# Altium PCB LM399_Test_Base.PcbDoc
Units mm, origin at the board's own origin, x right, y up, seen from the top; angles counter-clockwise.
Board outline 217.3 x 50.57 mm, 4 copper layers (Top Layer, Layer 1, Layer 2, Bottom Layer), stack 1.587 mm thick; 37 components, 11 nets, 102 pads, 167 vias.
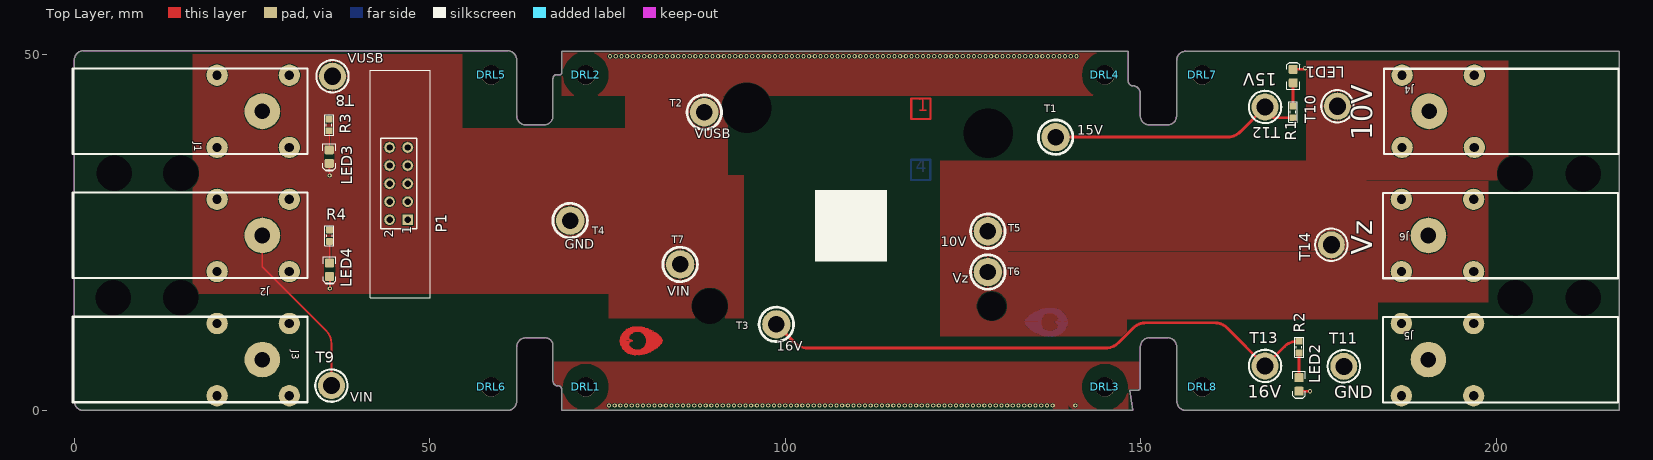
[diagram p0: Top Layer view]
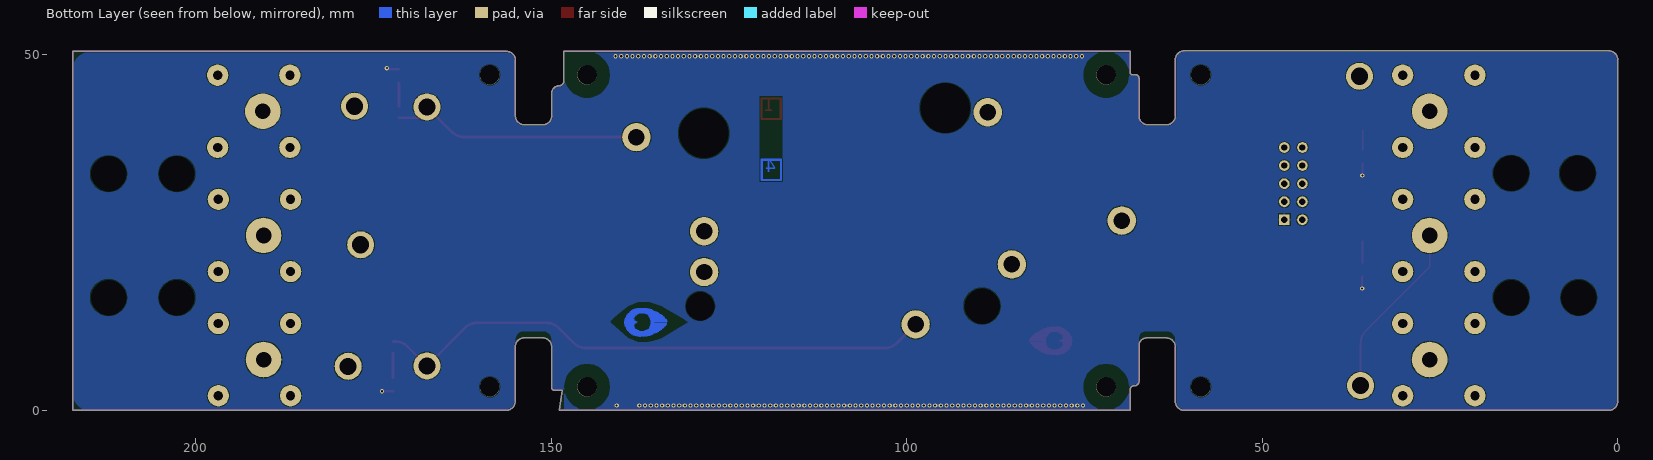
[diagram p1: Bottom Layer view, seen from below]
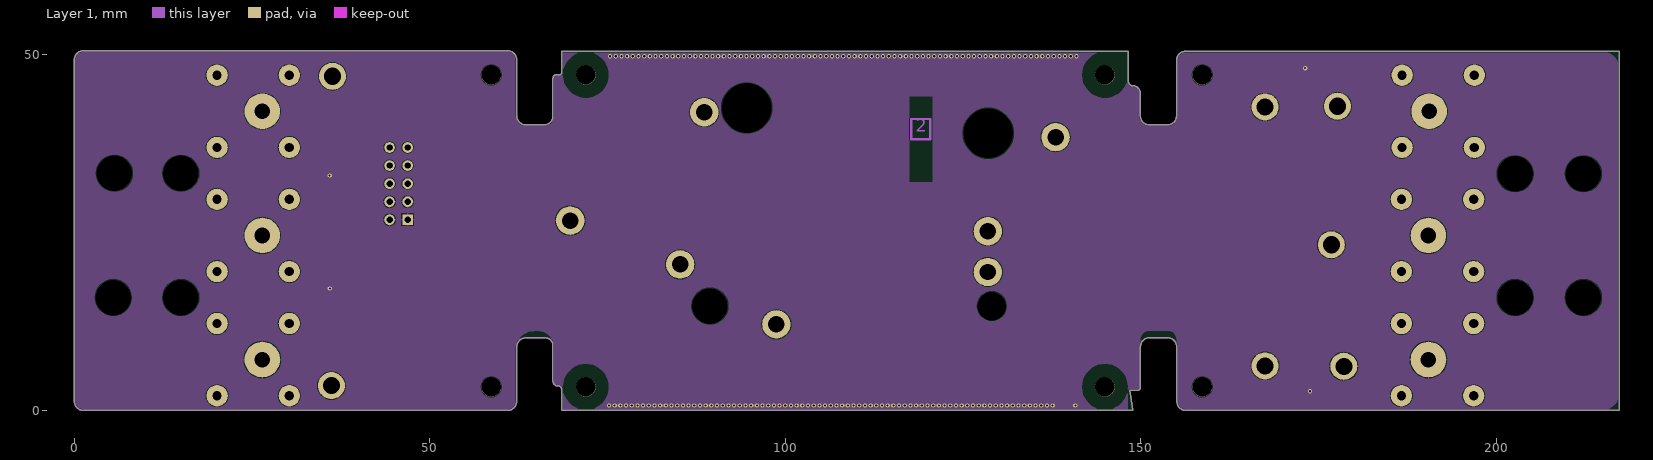
[diagram p2: Layer 1]
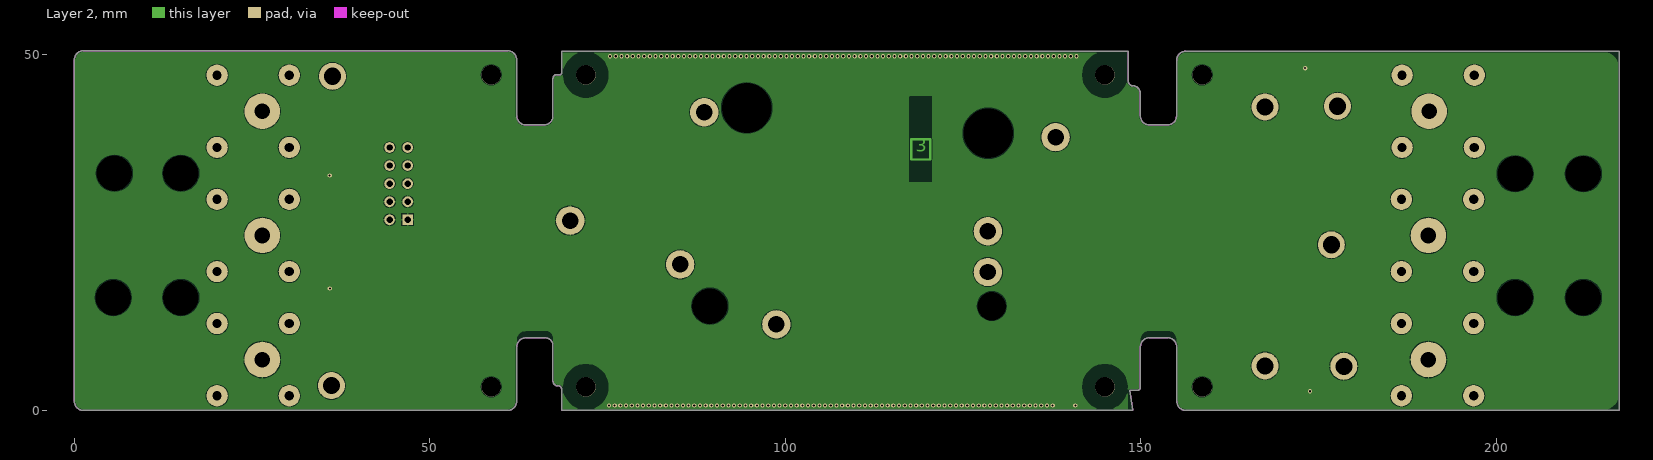
[diagram p3: Layer 2]
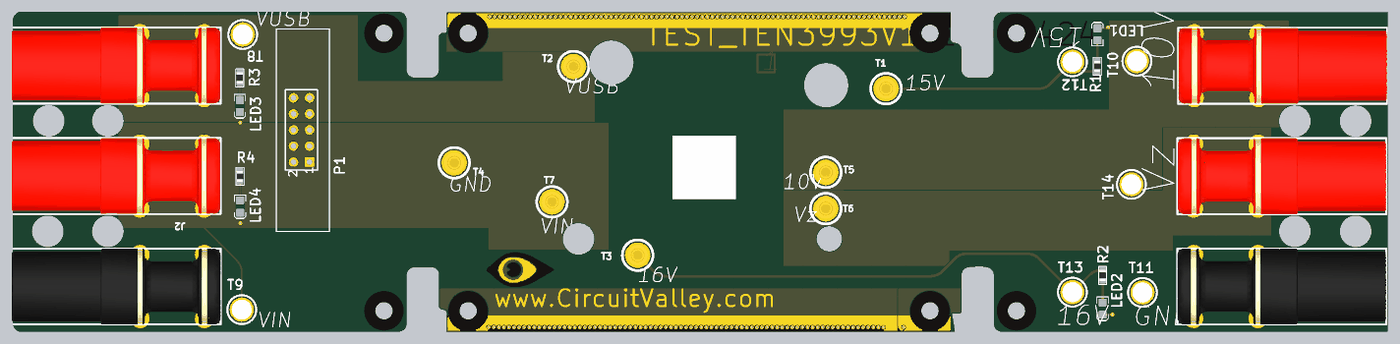
[diagram p4: 3D render of the assembled board from above, using the file's embedded part models]

## Layer stack, top to bottom
Top Solder: solder mask 0.0102, Solder Resist, Dk 3.5
Top Layer: signal copper 0.0356
Dielectric 2: prepreg 0.2104, PP-006, Dk 4.1
Layer 1: signal copper 0.0152
Dielectric 1: dielectric 1.065, FR-4, Dk 4.8
Layer 2: signal copper 0.0152
Dielectric 3: prepreg 0.2104, PP-006, Dk 4.1
Bottom Layer: signal copper 0.0356
Bottom Solder: solder mask 0.0102, Solder Resist, Dk 3.5

## Board outline
0,1.27 ccw(c1.27,1.27) 1.27,0 60.96,0 ccw(c60.96,1.27) 62.23,1.27 62.23,8.915 cw(c63.5,8.915) 63.5,10.185 66.269,10.185 cw(c66.269,9.119) 67.335,9.119 67.335,4.089 ccw(c67.97,4.089) 67.97,3.454 68.072,3.454 cw(c68.072,2.972) 68.555,2.972 68.555,0 148.913,0 148.463,2.845 149.581,2.845 ccw(c149.581,3.226) 149.962,3.226 149.962,8.941 cw(c151.232,8.941) 151.232,10.211 153.797,10.211 cw(c153.797,8.941) 155.067,8.941 155.067,1.27 ccw(c156.337,1.27) 156.337,0 217.297,0 217.297,50.5 156.718,50.5 156.312,50.5 ccw(c156.312,49.23) 155.042,49.23 155.042,41.427 cw(c153.772,41.427) 153.772,40.157 151.206,40.157 cw(c151.206,41.427) 149.936,41.427 149.936,44.577 ccw(c148.844,44.577) 148.844,45.669 cw(c148.844,46.259) 148.255,46.259 148.255,50.5 68.555,50.5 68.555,47.463 cw(c68.31,47.463) 68.31,47.219 67.843,47.219 ccw(c67.843,46.711) 67.335,46.711 67.335,41.427 cw(c66.065,41.427) 66.065,40.157 63.5,40.157 cw(c63.5,41.427) 62.23,41.427 62.23,49.301 ccw(c60.96,49.301) 60.96,50.571 1.27,50.571 ccw(c1.27,49.301) 0,49.301

## Design rules (kind name [scope] priority, off if disabled: settings)
Clearance Clearance_GNDT [OnLayer('GND_T')] p1: gap=0.127 ignorepadtopadclearanceinfootprint=FALSE
Clearance Clearance_INT [OnLayer('Signal_INT')] p2: gap=0.127 ignorepadtopadclearanceinfootprint=FALSE
Clearance [All] p3: gap=0.092 ignorepadtopadclearanceinfootprint=FALSE
Clearance Clearance_PWR [OnLayer('PWR')] p4: gap=0.127 ignorepadtopadclearanceinfootprint=FALSE
Clearance Clearance_GNDB [OnLayer('GND_B')] p5: gap=0.127 ignorepadtopadclearanceinfootprint=FALSE
ComponentClearance [All] p1: gap=0.254 collisioncheckmode=3 verticalgap=0 showdistances=FALSE
DiffPairsRouting [All] p1: maxlimit=0.102 minlimit=0.102 mostfreqgap=0.102 toplayer_minwidth=0.117 toplayer_maxwidth=0.254 toplayer_prefwidth=0.117 midlayer1_minwidth=0.117 midlayer1_maxwidth=0.254 midlayer1_prefwidth=0.117 midlayer2_minwidth=0.117 midlayer2_maxwidth=0.254 midlayer2_prefwidth=0.117 bottomlayer_minwidth=0.117 bottomlayer_maxwidth=0.254 bottomlayer_prefwidth=0.117 maxuncoupledlength=12.7
HoleSize [All] p1: absolutevalues=TRUE maxlimit=5 minlimit=0.025 maxpercent=80.000 minpercent=20.000
MatchedLengths Matched_MIPI_GRP [InNetClass('MIPI')] p1: tolerance=0.127 checknetsindiffpair=FALSE checkdiffpairvsdiffpair=TRUE checkxsignals=TRUE checkothers=TRUE
MatchedLengths Matched_MIPI [InNetClass('MIPI')] p2: tolerance=0.127 checknetsindiffpair=TRUE checkdiffpairvsdiffpair=FALSE checkxsignals=FALSE checkothers=FALSE
MatchedLengths Matched_GPIF_GRP [InNetClass('GPIF')] p3: tolerance=1.27 checknetsindiffpair=FALSE checkdiffpairvsdiffpair=TRUE checkxsignals=TRUE checkothers=TRUE
MatchedLengths Matched_USB3FX_GRP [InNetClass('USB3FX')] p4: tolerance=0.127 checknetsindiffpair=FALSE checkdiffpairvsdiffpair=TRUE checkxsignals=TRUE checkothers=TRUE
MatchedLengths Match_USB3FX [InNetClass('USB3FX')] p5: tolerance=0.102 checknetsindiffpair=TRUE checkdiffpairvsdiffpair=FALSE checkxsignals=FALSE checkothers=FALSE
MatchedLengths Matched_USB3_GRP [InNetClass('USB3')] p6: tolerance=0.254 checknetsindiffpair=FALSE checkdiffpairvsdiffpair=TRUE checkxsignals=TRUE checkothers=TRUE
MatchedLengths Matched_USB2 [InNetClass('USB2')] p7: tolerance=1.016 checknetsindiffpair=TRUE checkdiffpairvsdiffpair=FALSE checkxsignals=FALSE checkothers=FALSE
MatchedLengths Matched_USB3 [InNetClass('USB3')] p8: tolerance=0.102 checknetsindiffpair=TRUE checkdiffpairvsdiffpair=FALSE checkxsignals=FALSE checkothers=FALSE
MinimumSolderMaskSliver [All] p1: minsoldermaskwidth=0.001
PlaneClearance [All] p1: clearance=0.152
PlaneConnect PlaneConnect_1 [All] p1: pad.planeconnectstyle=Relief pad.reliefexpansion=0.508 pad.reliefentries=4 pad.reliefconductorwidth=0.254 pad.reliefairgap=0.127 via.planeconnectstyle=Direct via.reliefexpansion=0.508 via.reliefentries=4 via.reliefconductorwidth=0.254 via.reliefairgap=0.254
PolygonConnect [All] p1: thpad.connectstyle=Relief thpad.reliefconductorwidth=0.254 thpad.reliefentries=4 thpad.polygonreliefangle="90 Angle" thpad.airgapwidth=0.127 smdpad.connectstyle=Relief smdpad.reliefconductorwidth=0.254 smdpad.reliefentries=4 smdpad.polygonreliefangle="90 Angle" smdpad.airgapwidth=0.127 via.connectstyle=Direct via.reliefconductorwidth=0.254 via.reliefentries=4 via.polygonreliefangle="90 Angle" via.airgapwidth=0.254
RoutingVias [All] p1: holewidth=0.2 width=0.45 viastyle="Through Hole" minholewidth=0.2 minwidth=0.45 maxholewidth=6.3 maxwidth=7
SilkToSilkClearance [All] p1: silktosilkclearance=0
SilkToSolderMaskClearance [IsPad] p1: minsilkscreentomaskgap=0 clearancetoexposedcopper=TRUE
SolderMaskExpansion [All] p1: expansion=0.025 istentingtop=FALSE
Width [All] p1: maxlimit=1.27 minlimit=0.09 preferedwidth=0.127 midlayer1_minwidth=0.127 midlayer2_minwidth=0.127 minimp=50.000000 maximp=50.000000 favimp=50.000000
22 further rules are at their usual default settings.

## Components (designator, comment, footprint, x,y, rotation, side; value= is the part's Value field where it differs from the comment)
DRL1 "Mounting" NO_COPPER_NOMASK_2m75_6m2#1 71.958,3.302 r0 top locked
DRL2 "Mounting" NO_COPPER_NOMASK_2m75_6m2#1 71.958,47.185 r0 top locked
DRL3 "Mounting" NO_COPPER_NOMASK_2m75_6m2#2 143.972,3.302 r0 top locked
DRL4 "Mounting" NO_COPPER_NOMASK_2m75_6m2#3 144.272,46.685 r0 top locked
DRL5 "Mounting" NO_COPPER_NOMASK_2m75_6m2#4 58.649,47.185 r0 top
DRL6 "Mounting" NO_COPPER_NOMASK_2m75_6m2#4 58.649,3.302 r0 top
DRL7 "Mounting" NO_COPPER_NOMASK_2m75_6m2#4 158.648,47.185 r0 top
DRL8 "Mounting" NO_COPPER_NOMASK_2m75_6m2#5 158.648,3.581 r0 top
J1 "Banana" Banana_66.9040-22_RED 25.171,42.062 r180 top
J2 "Banana" Banana_66.9040-22_RED 25.171,24.6 r180 top
J3 "Banana" Banana_66.9040-21_BLACK 25.171,7.137 r180 top
J4 "Banana" Banana_66.9040-22_RED 191.846,42.062 r0 top
J5 "Banana" Banana_66.9040-21_BLACK 191.745,7.137 r0 top
J6 "Banana" Banana_66.9040-22_RED 191.745,24.6 r0 top
LED1 "" LED-0805-K 171.45,47.015 r90 top
LED2 "" LED-0805-K 172.263,3.645 r270 top
LED3 "" LED-0805-K 35.865,35.687 r270 top
LED4 "" LED-0805-K 35.916,19.774 r270 top
P1 "IDC" HDR2X5 46.887,26.813 r90 top
R1 "RES_NL_0603" RESC1608N 171.425,41.961 r90 top value=5K1
R2 "RES_NL_0603" RESC1608N 172.263,8.89 r270 top value=5K1
R3 "RES_NL_0603" RESC1608N 35.839,40.132 r270 top value=5K1
R4 "RES_NL_0603" RESC1608N 35.89,24.562 r270 top value=5K1
T1 "POGO" POGO_0851-0-15-20-82-14-11-0 138.024,38.43 r0 top locked
T2 "POGO" POGO_0851-0-15-20-82-14-11-0 88.612,41.929 r0 top locked
T3 "POGO" POGO_0851-0-15-20-82-14-11-0 98.755,12.09 r0 top locked
T4 "POGO" POGO_0851-0-15-20-82-14-11-0 69.748,26.695 r0 top locked
T5 "POGO" POGO_0851-0-15-20-82-14-11-0 128.499,25.197 r0 top locked
T6 "POGO" POGO_0851-0-15-20-82-14-11-0 128.499,19.456 r0 top locked
T7 "POGO" POGO_0851-0-15-20-82-14-11-0 85.217,20.523 r0 top locked
T8 "TestHook" 1502-x 36.322,46.99 r0 top
T9 "TestHook" 1502-x 36.17,3.48 r0 top
T10 "TestHook" 1502-x 177.673,42.774 r0 top
T11 "TestHook" 1502-x 178.562,6.198 r0 top
T12 "TestHook" 1502-x 167.488,42.672 r0 top
T13 "TestHook" 1502-x 167.488,6.248 r0 top
T14 "TestHook" 1502-x 176.809,23.292 r0 top

## Footprints (in the part's own frame and the unit in brackets; to place one, negate y for a bottom-side part, rotate by r counter-clockwise, add the part's x,y. Pads: shape width x height; smd on the part's side, far side on the other; paste and mask are expansions set on the pad)
1502-x [mm] "1502-1, 1502-2, 1502-3, 1502-4, Turret"
  round 3.8 hole 2.4: 1(0,0)
  silkscreen extent -2.27,-2.28 2.28,2.28, body extent -1.59,-1.58 1.59,1.58, height 5.58
Banana_66.9040-21_BLACK [mm] "Pomona 73099-0"
  round 5 hole 2.2: 1(-1.28,0)
  round 3 hole 1.3: 2(-5.08,5.08) 2(-5.08,-5.08) 2(5.08,5.08) 2(5.08,-5.08)
  silkscreen extent -7.65,-6.02 25.37,5.99, body extent -7.67,-5.99 25.33,6.01, height 12.19
Banana_66.9040-22_RED [mm] "Pomona 73099-2"
  round 5 hole 2.2: 1(-1.28,0)
  round 3 hole 1.3: 2(-5.08,5.08) 2(-5.08,-5.08) 2(5.08,5.08) 2(5.08,-5.08)
  silkscreen extent -7.65,-6.02 25.37,5.99, body extent -7.62,-6.03 25.38,5.97, height 12.19
HDR2X5 [mm] "Connector; Header; 5x2 Position"
  rect 1.5x1.5 hole 0.9: 1(0,0)
  round 1.5 hole 0.9: 2(0,2.54) 3(2.54,0) 4(2.54,2.54) 5(5.08,0) 6(5.08,2.54) 7(7.62,0) 8(7.62,2.54) 9(10.16,0) 10(10.16,2.54)
  silkscreen extent -1.27,-1.27 11.43,3.81
LED-0805-K [mil]
  round 20 on Mech14: 0(0,0)
  rrect25% 50x50 smd: A(-37.5,0) K(37.5,0)
  Top Layer pour cut-out: -15,30 15,30 15,-30 -15,-30
  silkscreen extent -72,-35 77,35, body extent -39,-25 39,25, height 31
NO_COPPER_NOMASK_2m75_6m2#1 [mm]
  round 6.3 on Keep-Out: 0(0,0)
  round 2.75 hole 2.75 unplated mask+1.75: D2m7(0,0)
NO_COPPER_NOMASK_2m75_6m2#2 [mm]
  round 6.3 on Keep-Out: 0(1,0)
  round 2.75 hole 2.75 unplated mask+1.75: D2m7(1,0)
NO_COPPER_NOMASK_2m75_6m2#3 [mm]
  round 2.75 hole 2.75 unplated mask+1.75: ""(0.7,0.5)
  round 6.3 on Keep-Out: ""(0.7,0.5)
NO_COPPER_NOMASK_2m75_6m2#4 [mm]
  round 2.75 hole 2.75 unplated mask+1.75: D2m7(0,0)
NO_COPPER_NOMASK_2m75_6m2#5 [mm]
  round 2.75 hole 2.75 unplated mask+1.75: D2m7(0,-0.279)
POGO_0851-0-15-20-82-14-11-0 [mm]
  round 4 hole 2.31: 1(0,0)
  silkscreen extent -2.42,-2.42 2.43,2.42, body extent -1.59,-1.58 1.59,1.58, height 8.12
RESC1608N [mm] "Chip Resistor, Body 1.6x0.8mm, 0603, IPC Medium Density"
  round 0.254 on Mech14: 0(0,0)
  rrect25% 0.95x1 smd: 1(-0.813,0) 2(0.813,0)
  silkscreen extent -1.41,-0.63 1.42,0.63, body extent -0.87,-0.47 0.88,0.48, height 0.54

## Part data
DRL1 DRL2 DRL3 DRL4 DRL5 DRL6 DRL7 DRL8: library part Mountinghole, "Mounting Hole"
LED1 LED2 LED3 LED4: library part LED_SMD_Green_0805, "LED, 0805 SMD, Green", Manufacturer 1=Ligitek, Manufacturer Part Number 1=LG170G-CT, Package / Case=0805, Ratings="10 mcd; 573 nm", Material=GaP
P1: library part "Header 5X2", "Header, 5-Pin, Dual row", LatestRevisionDate=17-Jul-2002, LatestRevisionNote="Re-released for DXP Platform.", Part=69830010LF, Publisher="Altium Limited"
R1 R2 R3 R4: "Resistor, SMD chip", Manufacturer 1="Royal Ohm", Package / Case="0603 (1608 metric)", Ratings="1/10 W", Tolerance=±5%
T1 T2 T3 T4 T5 T6 T7: library part TestHook

## Free pads (board coordinates)
  round 0 hole 5 unplated: M4(5.497,15.866) M4(5.649,33.341) M4(14.998,15.866) M4(14.998,33.341) M4(89.408,14.673) M4(202.652,15.866) M4(202.652,33.29) M4(212.27,15.866) M4(212.27,33.29)
  round 0 hole 7 unplated: M4(94.59,42.545) M4(128.557,38.972)
  round 0 hole 4 unplated: M4(129.057,14.673)

## Via types
v1: diameter 0.6, hole 0.3, Top Layer to Bottom Layer, 167 vias

## Nets (pads, with @x,y where several pads share a name; then routed paths per layer and width w, separated by ;. In a path a pad name is that pad's centre, name@x,y a point inside that pad or via, vN(x,y) a via of type N, cw(c..) or ccw(c..) an arc to the next point about the centre after c; other vN are vias at no path point)
GND: J3.1 J5.1 LED1.K LED2.K LED3.K LED4.K P1.1 P1.2 P1.3 P1.4 T4.1 T11.1 | length 6.7
  Top Layer w0.254: LED3.K 35.922,34.677 v1(35.922,33.034) ; LED4.K 35.954,18.783 v1(35.954,17.144)
  Top Layer w0.4: LED1.K 172.728,47.968 ccw(c172.728,48.532) v1(173.126,48.133) ; LED2.K v1(173.812,2.692)
  other v1: 75.209,0.686 76.009,0.686 76.809,0.686 77.609,0.686 78.409,0.686 79.209,0.686 80.009,0.686 80.809,0.686 81.609,0.686 82.409,0.686 83.209,0.686 84.009,0.686 84.809,0.686 85.609,0.686 86.409,0.686 87.209,0.686 88.009,0.686 88.809,0.686 89.609,0.686 90.409,0.686 91.209,0.686 92.009,0.686 92.809,0.686 93.609,0.686 94.409,0.686 95.209,0.686 96.009,0.686 96.809,0.686 97.609,0.686 98.409,0.686 99.209,0.686 100.009,0.686 100.809,0.686 101.609,0.686 102.409,0.686 103.209,0.686 104.009,0.686 104.809,0.686 105.609,0.686 106.409,0.686 107.209,0.686 108.009,0.686 108.809,0.686 109.609,0.686 110.409,0.686 111.209,0.686 112.009,0.686 112.809,0.686 113.609,0.686 114.409,0.686 115.209,0.686 116.009,0.686 116.809,0.686 117.609,0.686 118.409,0.686 119.209,0.686 120.009,0.686 120.809,0.686 121.609,0.686 122.409,0.686 123.209,0.686 124.009,0.686 124.809,0.686 125.609,0.686 126.409,0.686 127.209,0.686 128.009,0.686 128.809,0.686 129.609,0.686 130.409,0.686 131.209,0.686 132.009,0.686 132.809,0.686 133.609,0.686 134.409,0.686 135.209,0.686 136.009,0.686 136.809,0.686 137.609,0.686 140.809,0.686 75.362,49.801 76.162,49.801 76.962,49.801 77.762,49.801 78.562,49.801 79.362,49.801 80.162,49.801 80.962,49.801 81.762,49.801 82.562,49.801 83.362,49.801 84.162,49.801 84.962,49.801 85.762,49.801 86.562,49.801 87.362,49.801 88.162,49.801 88.962,49.801 89.762,49.801 90.562,49.801 91.362,49.801 92.162,49.801 92.962,49.801 93.762,49.801 94.562,49.801 95.362,49.801 96.162,49.801 96.962,49.801 97.762,49.801 98.562,49.801 99.362,49.801 100.162,49.801 100.962,49.801 101.762,49.801 102.562,49.801 103.362,49.801 104.162,49.801 104.962,49.801 105.762,49.801 106.562,49.801 107.362,49.801 108.162,49.801 108.962,49.801 109.762,49.801 110.562,49.801 111.362,49.801 112.162,49.801 112.962,49.801 113.762,49.801 114.562,49.801 115.362,49.801 116.162,49.801 116.962,49.801 117.762,49.801 118.562,49.801 119.362,49.801 120.162,49.801 120.962,49.801 121.762,49.801 122.562,49.801 123.362,49.801 124.162,49.801 124.962,49.801 125.762,49.801 126.562,49.801 127.362,49.801 128.162,49.801 128.962,49.801 129.762,49.801 130.562,49.801 131.362,49.801 132.162,49.801 132.962,49.801 133.762,49.801 134.562,49.801 135.362,49.801 136.162,49.801 136.962,49.801 137.762,49.801 138.562,49.801 139.362,49.801 140.162,49.801 140.962,49.801
NetJ4_1: J4.1 T5.1 T10.1
NetJ6_1: J6.1 T6.1 T14.1
NetLED1_A: LED1.A R1.2 | length 3.3
  Top Layer w0.4: R1.2 171.425,46.002 cw(c171.511,46.002) LED1.A
NetLED2_A: LED2.A R2.2 | length 3.5
  Top Layer w0.4: LED2.A R2.2
NetLED3_A: LED3.A R3.2 | length 2.7
  Top Layer w0.254: R3.2 cw(c35.839,39.294) 35.865,39.294 LED3.A
NetLED4_A: LED4.A R4.2 | length 3
  Top Layer w0.254: R4.2 cw(c35.89,23.723) 35.916,23.723 LED4.A
NetR1_1: R1.1 T1.1 T12.1 | length 33.9
  Top Layer w0.4: T1.1 162.194,38.43 ccw(c162.194,40.97) 162.282,38.432 ccw(c162.194,40.97) 163.99,39.174 T12.1 ; T12.1@168.592,41.199 ccw(c169.099,43.688) 169.099,41.148 R1.1
NetR2_1: R2.1 T3.1 T13.1 | length 79.8
  Top Layer w0.4: T3.1 101.339,9.507 ccw(c103.135,11.303) 103.135,8.763 145.074,8.763 ccw(c145.074,11.303) 145.52,8.802 ccw(c145.074,11.303) 146.87,9.507 148.938,11.575 cw(c150.734,9.779) 150.734,12.319 160.365,12.319 cw(c160.365,9.779) 162.161,11.575 T13.1 170.198,8.959 cw(c171.995,7.163) 171.995,9.703 R2.1
VBUS: J1.1 P1.7 P1.8 P1.9 P1.10 R3.1 T2.1 T8.1
VIN: J2.1 P1.5 P1.6 R4.1 T7.1 T9.1 | length 25
  Top Layer w0.254: J2.1 26.451,20.183 35.426,11.209 cw(c33.63,9.413) 36.17,9.413 T9.1
pads on no net: DRL1.0 DRL1.D2m7 DRL2.0 DRL2.D2m7 DRL3.0 DRL3.D2m7 DRL4. DRL5.D2m7 DRL6.D2m7 DRL7.D2m7 DRL8.D2m7 J1.2 J2.2 J3.2 J4.2 J5.2 J6.2 LED1.0 LED2.0 LED3.0 LED4.0 R1.0 R2.0 R3.0 R4.0
copper on no net: | length 70.5
  Top Layer w0.15: 76.771,9.786 77.992,9.786 77.992,9.797 ; 80.905,9.798 82.613,9.798
  Top Layer w0.305: 117.729,40.996 120.421,40.996 120.421,43.84 117.729,43.84 117.729,40.996
  Top Layer w0.4: 80.608,9.779 ccw(c78.994,9.779) 80.608,9.779
  Layer 1 w0.305: 117.713,38.141 117.713,40.986 120.405,40.986 120.405,38.141 117.713,38.141
  Layer 2 w0.305: 117.713,35.296 117.713,38.141 120.405,38.141 120.405,35.296 117.713,35.296
  Bottom Layer w0.15: 133.824,12.415 135.532,12.415 ; 138.445,12.414 138.445,12.403 139.666,12.403
  Bottom Layer w0.305: 117.701,32.401 120.394,32.401 120.394,35.246 117.701,35.246 117.701,32.401
  Bottom Layer w0.4: 139.058,12.396 ccw(c137.443,12.396) 139.058,12.396

## Polygon pours and split planes (outlines as drawn)
VIN on Top Layer "NONET_L01_P-001" (solid, pour order 32): 16.662,33.045 16.662,16.408 75.159,16.408 75.159,12.954 94.183,12.954 94.183,33.045 77.368,33.045 16.967,33.045
VBUS on Top Layer "NONET_L01_P-001" (solid, pour order 33): 16.662,33.045 16.662,50.063 54.559,50.063 54.559,39.649 77.47,39.649 77.47,44.907 91.948,44.907 91.948,33.045 16.815,33.045
NetJ6_1 on Top Layer "NONET_L01_P-001" (solid, pour order 31): 121.818,22.403 121.818,10.414 148.006,10.414 148.006,12.802 183.337,12.802 183.337,15.189 198.907,15.189 198.907,32.334 181.686,32.334 181.686,22.403
NetJ4_1 on Top Layer "NONET_L01_P-001" (solid, pour order 30): 121.818,22.403 121.818,35.128 173.304,35.128 173.304,49.149 201.676,49.149 201.676,32.334 181.686,32.334 181.686,22.428 131.267,22.428 131.267,22.403 130.124,22.403
no net on Top Layer "Top Layer-GND 1" (solid, pour order 22): 103.861,44.282 109.372,44.282 148.234,44.282 148.234,50.505 68.555,50.505 68.555,44.282
no net on Top Layer "NONET_L01_P-001" (solid, pour order 13): 68.555,3.023 ccw(c68.123,3.023) 68.123,3.454 68.021,3.454 cw(c68.021,4.14) 67.335,4.14 67.335,6.807 139.802,6.807 139.802,-0.025 71.501,-0.025 71.476,0 68.728,0 cw(c68.728,0.173) 68.555,0.173
no net on Top Layer "NONET_L01_P-001" (solid, pour order 20): 139.725,6.833 139.725,1.372 ccw(c141.097,1.372) 141.097,0 148.238,0 148.209,2.845 149.479,2.845 ccw(c149.479,3.302) 149.936,3.302 149.936,6.858 139.751,6.858
no net on Top Overlay "NONET_L01_P-001" (solid): 114.249,20.955 114.249,30.963 104.242,30.963 104.242,20.955
no net on Top Solder "NONET_L01_P-001" (solid, pour order 14): 68.555,0 68.555,2.554 148.26,2.554 148.26,0
no net on Top Solder "NONET_L01_P-001" (solid): 148.209,50.462 148.209,48.039 68.555,48.039 68.555,50.462
no net on Bottom Solder "NONET_L01_P-001" (solid): 72.441,0.051 72.441,3.353 144.069,3.353 144.069,0.051
no net on Bottom Solder "NONET_L01_P-001" (solid): 143.916,50.47 143.916,47.168 72.288,47.168 72.288,50.47
GND on Layer 1 "Layer 1-GND" (solid, pour order 27): -0.025,49.225 -0.025,1.295 ccw(c1.27,1.295) 1.27,0 60.909,0 ccw(c60.909,1.295) 62.205,1.295 62.205,8.738 cw(c64.617,8.738) 64.617,11.151 65.297,11.151 cw(c65.303,9.093) 67.361,9.093 67.361,4.064 ccw(c67.996,4.064) 67.996,3.429 68.097,3.429 cw(c68.097,2.972) 68.555,2.972 68.555,0 137.295,0 141.062,0 ccw(c141.067,1.165) 141.074,0 148.209,0 148.209,2.845 149.53,2.845 ccw(c149.53,3.251) 149.936,3.251 149.936,9.754 ccw(c149.951,9.771) 149.951,9.748 149.954,9.746 149.954,9.898 cw(c151.232,9.898) 151.232,11.176 153.822,11.176 cw(c153.822,9.931) 155.067,9.931 155.067,1.321 ccw(c156.388,1.321) 156.388,0 214.859,0 ccw(c214.859,2.438) 217.297,2.438 217.297,47.955 ccw(c214.757,47.955) 214.757,50.495 156.286,50.495 ccw(c156.286,49.251) 155.042,49.251 155.042,41.351 cw(c153.873,41.351) 153.873,40.183 151.144,40.183 cw(c151.144,41.398) 149.936,41.262 149.936,44.577 ccw(c148.844,44.577) 148.844,45.669 cw(c148.844,46.304) 148.209,46.304 148.209,50.495 71.984,50.495 68.504,50.495 68.504,47.295 cw(c68.428,47.295) 68.428,47.219 67.869,47.219 ccw(c67.869,46.711) 67.361,46.711 67.361,41.427 cw(c66.091,41.427) 66.091,40.157 63.576,40.157 cw(c63.576,41.504) 62.23,41.504 62.23,49.352 ccw(c61.011,49.352) 61.011,50.571 1.321,50.571 ccw(c1.321,49.225)
GND on Layer 2 "Layer 2-GND" (solid, pour order 29): -0.025,49.225 -0.025,1.295 ccw(c1.27,1.295) 1.27,0 60.909,0 ccw(c60.909,1.295) 62.205,1.295 62.205,9.906 cw(c63.449,9.906) 63.449,11.151 66.37,11.151 cw(c66.37,10.16) 67.361,10.16 67.361,4.064 ccw(c67.996,4.064) 67.996,3.429 68.097,3.429 cw(c68.097,2.972) 68.555,2.972 68.555,0 137.295,0 141.062,0 ccw(c141.067,1.232) 141.074,0 148.209,0 148.209,2.845 149.53,2.845 ccw(c149.53,3.251) 149.936,3.251 149.936,9.754 ccw(c149.951,9.771) 149.951,9.748 149.954,9.746 149.954,9.898 cw(c151.232,9.898) 151.232,11.176 153.822,11.176 cw(c153.822,9.931) 155.067,9.931 155.067,1.321 ccw(c156.388,1.321) 156.388,0 214.859,0 ccw(c214.859,2.438) 217.297,2.438 217.297,47.955 ccw(c214.757,47.955) 214.757,50.495 156.286,50.495 ccw(c156.286,49.251) 155.042,49.251 155.042,41.351 cw(c153.873,41.351) 153.873,40.183 151.144,40.183 cw(c151.144,41.398) 149.936,41.262 149.936,44.577 ccw(c148.844,44.577) 148.844,45.669 cw(c148.844,46.304) 148.209,46.304 148.209,50.495 71.984,50.495 68.504,50.495 68.504,47.295 cw(c68.428,47.295) 68.428,47.219 67.869,47.219 ccw(c67.869,46.711) 67.361,46.711 67.361,41.427 cw(c66.091,41.427) 66.091,40.157 63.576,40.157 cw(c63.576,41.504) 62.23,41.504 62.23,49.352 ccw(c61.011,49.352) 61.011,50.571 1.321,50.571 ccw(c1.321,49.225) -0.025,49.225
GND on Bottom Layer "Bottom Layer-No Net" (solid, pour order 35): -0.025,49.2 -0.025,1.27 ccw(c1.27,1.27) 1.27,-0.025 60.909,-0.025 ccw(c60.909,1.27) 62.205,1.27 62.205,9.881 cw(c63.449,9.881) 63.449,11.125 66.37,11.125 cw(c66.37,10.135) 67.361,10.135 67.361,4.038 ccw(c67.996,4.038) 67.996,3.404 68.097,3.404 cw(c68.097,2.946) 68.555,2.946 68.555,-0.025 137.295,-0.025 141.062,-0.025 ccw(c141.067,1.207) 141.074,-0.025 148.209,-0.025 148.209,2.819 149.53,2.819 ccw(c149.53,3.226) 149.936,3.226 149.936,9.729 ccw(c149.951,9.746) 149.951,9.723 149.954,9.721 149.954,9.873 cw(c151.232,9.873) 151.232,11.151 153.822,11.151 cw(c153.822,9.906) 155.067,9.906 155.067,1.295 ccw(c156.388,1.295) 156.388,-0.025 214.859,-0.025 ccw(c214.859,2.413) 217.297,2.413 217.297,47.93 ccw(c214.757,47.93) 214.757,50.47 156.286,50.47 ccw(c156.286,49.225) 155.042,49.225 155.042,41.326 cw(c153.873,41.326) 153.873,40.157 151.144,40.157 cw(c151.144,41.373) 149.936,41.237 149.936,44.552 ccw(c148.844,44.552) 148.844,45.644 cw(c148.844,46.279) 148.209,46.279 148.209,50.47 71.984,50.47 68.504,50.47 68.504,47.269 cw(c68.428,47.269) 68.428,47.193 67.869,47.193 ccw(c67.869,46.685) 67.361,46.685 67.361,41.402 cw(c66.091,41.402) 66.091,40.132 63.576,40.132 cw(c63.576,41.478) 62.23,41.478 62.23,49.327 ccw(c61.011,49.327) 61.011,50.546 1.321,50.546 ccw(c1.321,49.2) -0.025,49.2

## Keep-outs
Keep-Out Layer:
  lines w0.15: 62.23,8.915 cw(c63.5,8.915) 63.5,10.185 66.269,10.185 cw(c66.269,9.119) 67.335,9.119 67.335,4.089 ccw(c67.97,4.089) 67.97,3.454 68.072,3.454 cw(c68.072,2.972) 68.555,2.972 68.555,0 140.97,0 145.04,0 148.082,0 148.913,0 148.463,2.845 149.581,2.845 ccw(c149.581,3.226) 149.962,3.226 149.962,6.883 149.962,8.941 cw(c151.232,8.941) 151.232,10.211 153.797,10.211 cw(c153.797,8.941) 155.067,8.941 155.067,6.325 155.067,1.956 155.067,1.27 ccw(c156.337,1.27) 156.337,0 156.693,0 217.297,0 217.297,50.5 156.718,50.5 156.312,50.5 ccw(c156.312,49.23) 155.042,49.23 155.042,49.225 155.042,42.113 155.042,41.427 cw(c153.772,41.427) 153.772,40.157 151.206,40.157 cw(c151.206,41.427) 149.936,41.427 149.936,42.113 149.936,44.577 ccw(c148.844,44.577) 148.844,45.669 cw(c148.844,46.259) 148.255,46.259 148.255,50.5 145.051,50.5 68.555,50.5 68.555,47.463 cw(c68.31,47.463) 68.31,47.219 67.843,47.219 ccw(c67.843,46.711) 67.335,46.711 67.335,41.427 cw(c66.065,41.427) 66.065,40.157 63.5,40.157 cw(c63.5,41.427) 62.23,41.427 62.23,49.301 ccw(c60.96,49.301) 60.96,50.571 59.334,50.571 28.169,50.571 1.27,50.571 ccw(c1.27,49.301) 0,49.301 0,1.27 ccw(c1.27,1.27) 1.27,0 28.245,0 60.96,0 ccw(c60.96,1.27) 62.23,1.27 62.23,8.941

## Other copper
Top Layer:
  region: 80.025,8.713 80.025,8.668 79.845,8.668 79.845,8.713 79.98,8.713 79.98,8.758 80.025,8.758
  region: 80.205,10.563 80.296,10.563 80.296,10.518 80.296,10.473 80.205,10.473 80.205,10.518 80.205,10.563 80.16,10.563 80.16,10.608 80.205,10.608
  region: 80.16,10.698 80.16,10.653 80.115,10.653 80.115,10.698 80.115,10.743 80.16,10.743
  region: 79.935,10.924 80.025,10.924 80.025,10.879 79.845,10.879 79.845,10.924 79.89,10.924 79.89,10.969 79.935,10.969
  region: 227 vertices and 1 holes, not listed, extent 77.454,8.262 79.845,11.33
  region: 306 vertices and 5 holes, not listed, extent 76.704,7.749 82.748,11.764
  text "1" at 118.543,41.436 h3.05
Layer 1:
  pour cut-out: 117.5,44.12 117.5,32.131 120.65,32.131 120.65,44.12
  text "2" at 118.363,38.582 h3.05
Layer 2:
  pour cut-out: 117.475,44.12 117.475,32.131 120.599,32.131 120.599,44.145 117.551,44.145
  text "3" at 118.364,35.756 h3.05
Bottom Layer:
  pour cut-out: 134.567,10.158 135.179,9.931 135.661,9.779 136.381,9.629 137.846,9.652 139.163,10.189 141.58,12.294 141.63,12.522 141.084,13.068 140.259,13.792 139.14,14.655 137.846,15.189 136.131,15.176 134.478,14.611 134.033,14.376 131.572,12.929 130.81,12.395
  region: 306 vertices and 5 holes, not listed, extent 133.689,10.366 139.733,14.381
  region: 227 vertices and 1 holes, not listed, extent 136.592,10.879 138.983,13.947
  region: 136.502,13.541 136.412,13.541 136.412,13.495 136.592,13.495 136.592,13.541 136.547,13.541 136.547,13.586 136.502,13.586
  region: 136.277,13.315 136.277,13.27 136.322,13.27 136.322,13.315 136.322,13.36 136.277,13.36
  region: 136.232,13.18 136.141,13.18 136.141,13.135 136.141,13.089 136.232,13.089 136.232,13.135 136.232,13.18 136.277,13.18 136.277,13.225 136.232,13.225
  region: 136.412,11.33 136.412,11.285 136.592,11.285 136.592,11.33 136.457,11.33 136.457,11.375 136.412,11.375
  pour cut-out: 117.5,44.145 120.675,44.145 120.675,32.131 117.5,32.131
  text "4" at 118.323,32.847 h3.05

## Silkscreen, mask and mechanical layers (free items; w line width, h text height)
Top Overlay:
  lines w0.15: 41.631,15.824 50.038,15.824 50.038,47.854 41.631,47.854 41.631,15.824
  text "VUSB" at 38.458,48.418 h2.29
  text "15V" at 169.1,48.04 h3 r180
  text "15V" at 141.097,38.24 h2.29
  text "10V" at 183.522,38.012 h5 r90
  text "VUSB" at 87.277,37.75 h2.29
  text "10V" at 121.844,22.619 h2.29
  text "GND" at 68.958,22.205 h2.29
  text "Vz" at 183.543,21.856 h5 r90
  text "Vz" at 123.54,17.428 h2.29
  text "VIN" at 83.434,15.6 h2.29
  text "16V" at 98.831,7.887 h2.29
  text "16V" at 165.088,1.134 h3
  text "GND" at 177.216,1.073 h3
  text "VIN" at 38.806,0.741 h2.29
Top Solder:
  drawing of 5 lines, arcs and shapes, not listed
  text "TEST_TEN3993V1 1V0 5424" at 99.72,45.364 h3.48
  text "www.CircuitValley.com" at 75.819,4.013 h2.7
Bottom Solder:
  drawing of 5 lines, arcs and shapes, not listed
  text "www.CircuitValley.Com" at 137.49,7.188 h3
  text "TEST_TEN3993V1 1V0 5424" at 137.312,4.064 h3.48
Mechanical 13:
  circle w0.15: c158.648,47.185 r0.075
  circle w0.15: c158.648,3.302 r0.067
  circle w0.15: c58.649,3.302 r0.062
  circle w0.15: c158.648,47.185 r0
  circle w0.15: c158.648,3.302 r0
  circle w0.15: c58.649,3.302 r0
  circle w0.15: c58.649,47.185 r0.153
  circle w0.15: c89.408,14.673 r0.096
  circle w0.15: c89.408,14.673 r2.511
  circle w0.15: c129.057,14.673 r0.059
  circle w0.15: c129.057,14.673 r2.031
  circle w0.15: c128.557,38.972 r0.074
  circle w0.15: c128.557,38.972 r3.512
  circle w0.15: c94.59,42.545 r0.066
  circle w0.15: c94.59,42.545 r3.559

## Text inside footprints (layer, text, board x,y; h text height)
P1: Top Overlay "1" at 47.395,24.781 h1.27 r90; Top Overlay "2" at 44.855,24.273 h1.27 r90